# EAGLE board Spannungsversorgung_V4_mitBatze (EAGLE 9.6.2)
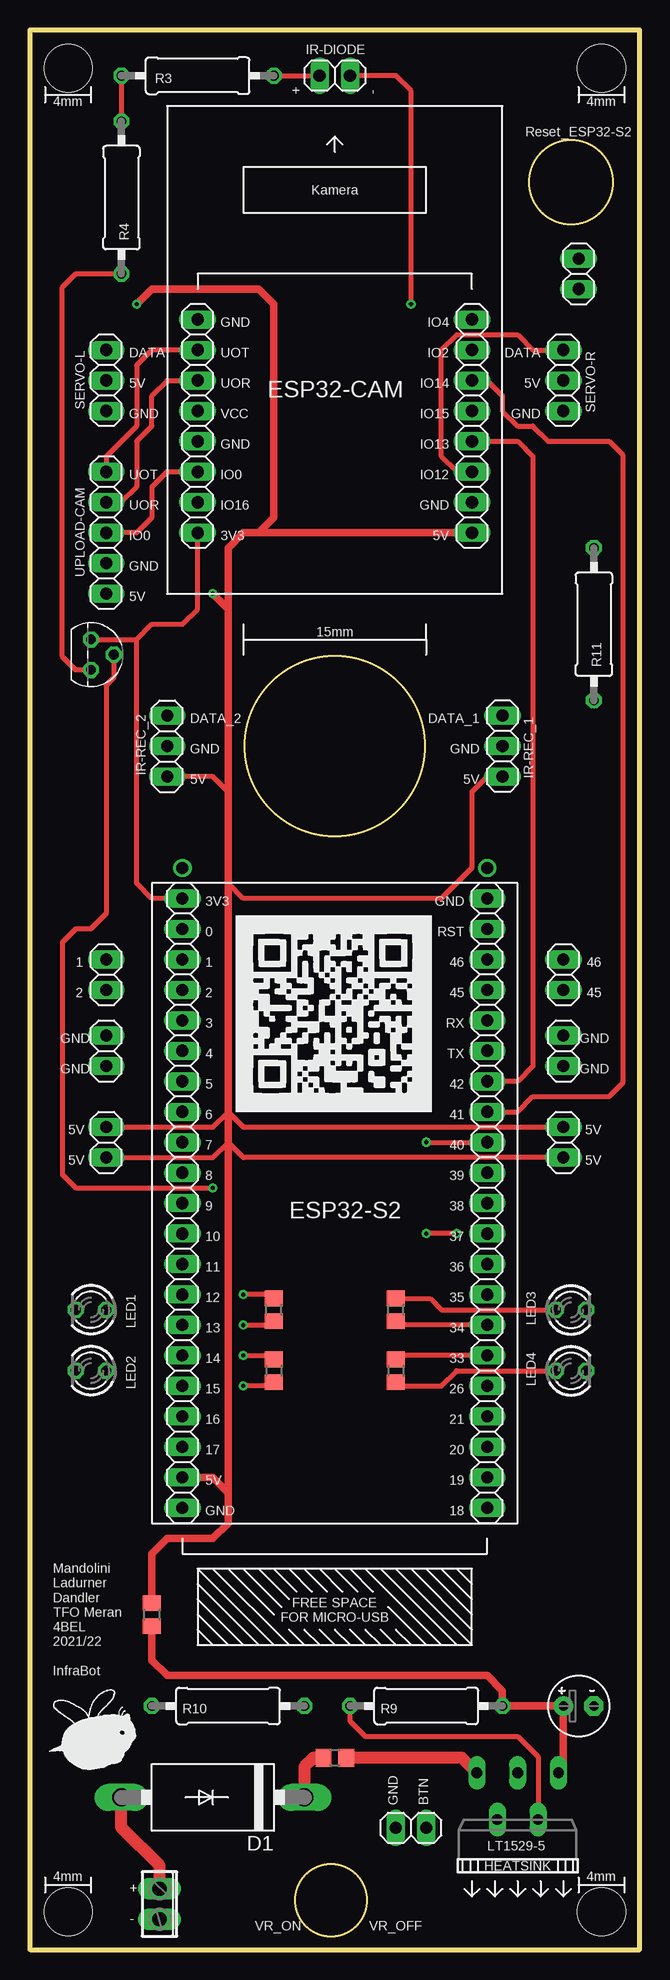
[diagram p0: board, top side]
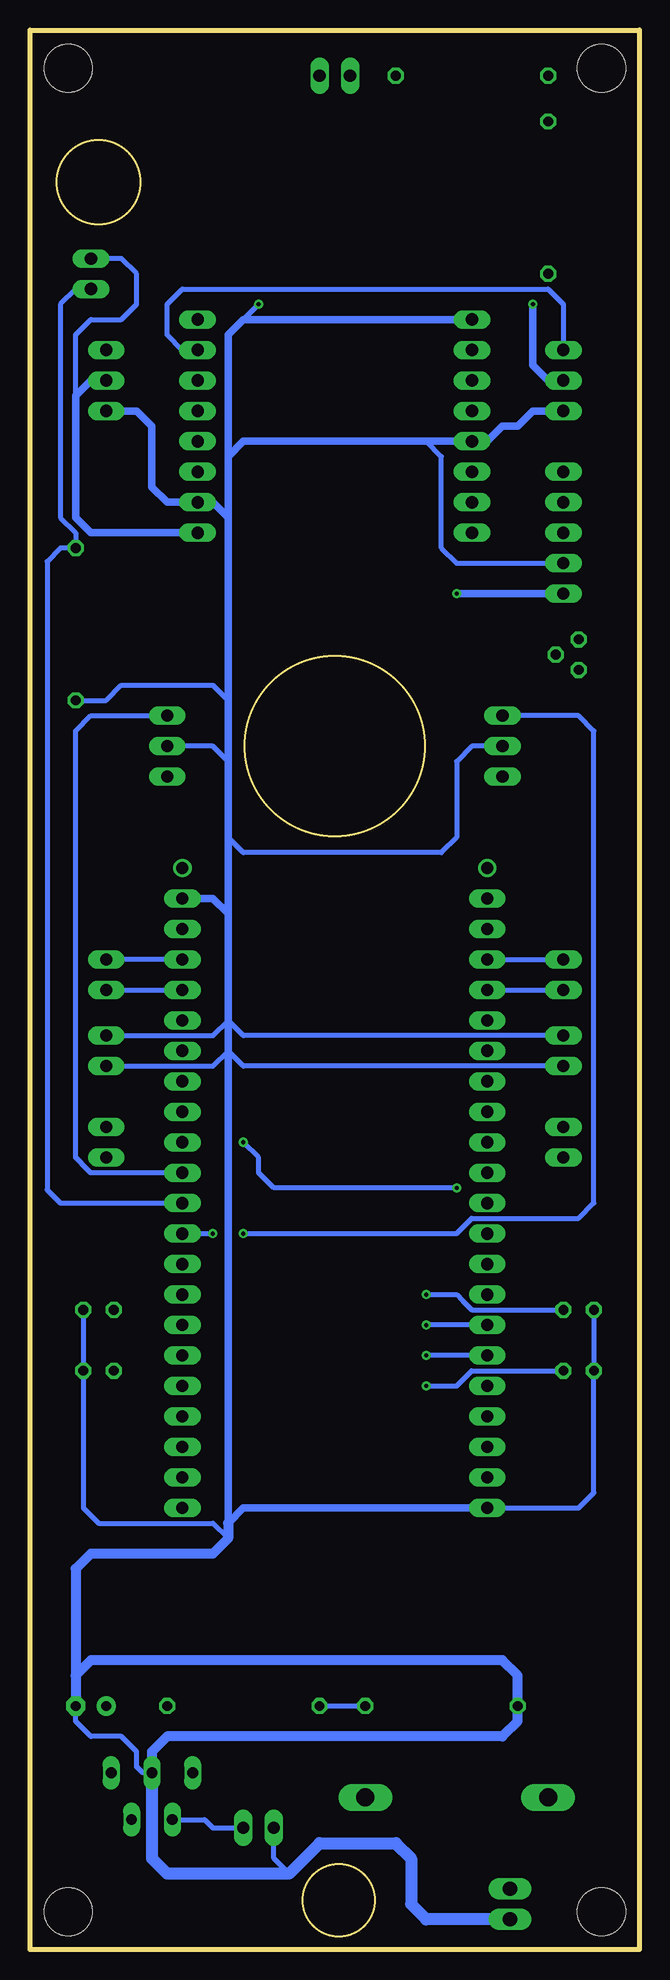
[diagram p1: board, bottom side, seen from below]

Size 50.8 x 160.02 mm. Coordinates in mm from the lower left corner, seen from the top.
Outline: 0,0 50.8,0 50.8,160.02 0,160.02 0,0
Copper layers (1*16): Top 0.035mm / dielectric 1.5mm / Bottom 0.035mm
Design rules "default *": minimum track width 6mil, minimum drill 0.35mm, track to track 12mil, track to pad 12mil, pad to pad 12mil, via to via 12mil, smd to smd 12mil, copper to edge 40mil, drill to drill 12mil, minimum pad ring 10mil, minimum via ring 8mil, stop-mask expansion 4mil, vias tented up to drill 0mil, thermal gap 10mil
Holes 4 mm at 3.17,156.84 47.62,156.84 47.62,3.17 3.17,3.17
Milling: area 17.9,92.8 to 32.9,107.8; area 22.1,1.1 to 28.1,7.1; area 41.6,143.8 to 48.6,150.8

## Footprints (pad centres in the part's own frame; a part is rotated, then mirrored left to right if it is on the bottom)
E2,5-5 = drill 0.813 pad 1.6: + -1.27,0 | drill 0.813 pad 1.6 octagon: - 1.27,0
DO201-15 = drill 1.499 long: A 7.62,0; C -7.62,0
TO220-5 = drill 0.9 long: 1 -3.4,-8.4; 2 -1.7,-4.5; 3 0,-8.4; 4 1.7,-4.5; 5 3.4,-8.4
1X19 = drill 1.016 long: 1 -22.86,0; 2 -20.32,0; 3 -17.78,0; 4 -15.24,0; 5 -12.7,0; 6 -10.16,0; 7 -7.62,0; 8 -5.08,0; 9 -2.54,0; 10 0,0; 11 2.54,0; 12 5.08,0; 13 7.62,0; 14 10.16,0; 15 12.7,0; 16 15.24,0; 17 17.78,0; 18 20.32,0; 19 22.86,0
1X08 = drill 1.016 long: 1 -8.89,0; 2 -6.35,0; 3 -3.81,0; 4 -1.27,0; 5 1.27,0; 6 3.81,0; 7 6.35,0; 8 8.89,0
1X03 = drill 1.016 long: 1 -2.54,0; 2 0,0; 3 2.54,0
1X02 = drill 1.016 long: 1 -1.27,0; 2 1.27,0
1X05 = drill 1.016 long: 1 -5.08,0; 2 -2.54,0; 3 0,0; 4 2.54,0; 5 5.08,0
LED3MM = drill 0.813 octagon: A -1.27,0; K 1.27,0
R0805 = smd 1.3 x 1.5: 1 -0.95,0; 2 0.95,0
0309/12 = drill 0.813 octagon: 1 -6.35,0; 2 6.35,0
TO92 = drill 0.813 octagon: 1 1.27,0; 2 0,1.905; 3 -1.27,0
2POL254 = drill 1.2 long: 1 -1.27,0; 2 1.27,0

## Placement (x,y rotation side)
C2  22µF  [E2,5-5]  45.72,20.32 0 top
D1  1N5400  [DO201-15]  15.24,12.7 180 top
IC2  LT1529-5  [TO220-5]  40.64,6.35 180 top
JP1  [1X19]  12.7,59.69 270 top
JP2  [1X19]  38.1,59.69 270 top
JP3  [1X08]  13.97,127 270 top
JP4  [1X08]  36.83,127 270 top
JP5  [1X03]  6.35,130.81 270 top
JP6  [1X03]  44.45,130.81 270 top
JP7  [1X02]  31.75,10.16 180 top
JP8  [1X02]  25.4,156.21 0 top
JP9  [1X03]  11.43,100.33 90 top
JP10  [1X02]  6.35,67.31 90 top
JP11  [1X02]  44.45,67.31 90 top
JP12  [1X02]  6.35,81.28 90 top
JP13  [1X02]  44.45,81.28 90 top
JP14  [1X02]  6.35,74.93 90 top
JP15  [1X02]  44.45,74.93 90 top
JP16  [1X02]  12.7,86.36 270 top
JP17  [1X02]  38.1,86.36 270 top
JP18  [1X03]  39.37,100.33 270 top
JP19  [1X02]  45.72,139.7 90 top
JP20  [1X05]  6.35,118.11 270 top
LED1  [LED3MM]  5.08,53.34 180 top
LED2  [LED3MM]  5.08,48.26 180 top
LED3  [LED3MM]  45.09,53.34 0 top
LED4  [LED3MM]  45.09,48.26 0 top
R1  0 Ohm  [R0805]  10.16,27.94 90 top
R2  0 Ohm  [R0805]  25.4,16.01 0 top
R3  10 Ohm  [0309/12]  13.97,156.21 0 top
R4  10 Ohm  [0309/12]  7.62,146.05 90 top
R5  330 Ohm  [R0805]  20.32,53.34 90 top
R6  330 Ohm  [R0805]  20.32,48.26 270 top
R7  330 Ohm  [R0805]  30.48,53.34 90 top
R8  330 Ohm  [R0805]  30.48,48.26 270 top
R9  270k Ohm  [0309/12]  33.02,20.32 0 top
R10  820 Ohm  [0309/12]  16.51,20.32 0 top
R11  10k Ohm  [0309/12]  46.99,110.49 90 top
T1  BC337  [TO92]  5.08,107.95 270 top
X1  [2POL254]  10.79,3.81 270 top

## Library data of the parts
C2 = rcl; SPICEPREFIX: C
D1 = diode
IC2 = ltc1440_lt1529_ds1302
JP1-JP20 = pinhead
LED1-LED4 = led
R1-R11 = rcl; SPICEPREFIX: R
T1 = transistor
X1 = con-phoenix-254; OC_FARNELL: unknown; OC_NEWARK: unknown

## Nets
3V3: JP3.8 JP16.1 T1.3
5V: JP1.18 JP4.8 JP5.2 JP6.2 JP9.1 JP10.1 JP10.2 JP11.1 JP11.2 JP18.3 JP19.2 JP20.5 R1.2
BATTERY: D1.C R2.1
BUTTON: IC2.4 JP7.1
DATA_1: JP1.2 JP12.1
DATA_2: JP1.1 JP12.2
DATA_3: JP2.2 JP13.1
DATA_4: JP2.1 JP13.2
GND: C2.- IC2.3 JP1.19 JP3.1 JP3.5 JP4.7 JP5.3 JP6.3 JP7.2 JP8.2 JP9.2 JP14.1 JP14.2 JP15.1 JP15.2 JP17.1 JP18.2 JP20.4 LED1.K LED2.K LED3.K LED4.K R10.1 R11.1 X1.2
HWSERIAL_0: JP2.6 JP4.3
HWSERIAL_1: JP2.5 JP4.5
IR_REC_1: JP2.8 JP18.1
IR_REC_2: JP2.10 JP9.3
IR_SEND: JP2.7 T1.2
N$1: R3.1 R4.2
N$2: JP8.1 R3.2
N$3: IC2.5 R2.2
N$4: D1.A X1.1
N$5: LED1.A R5.2
N$6: LED2.A R6.2
N$7: LED3.A R7.2
N$8: LED4.A R8.2
N$11: R4.1 T1.1
N$13: IC2.2 R9.1 R10.2
N$14: C2.+ IC2.1 R1.1 R9.2
RESET_CAM: JP3.6 JP20.3
RESET_S2: JP2.9 JP19.1 R11.2
RX_CAM: JP3.3 JP20.2
SERVO_L: JP4.2 JP5.1
SERVO_R: JP4.6 JP6.1
STATELED_1: JP1.13 R5.1
STATELED_2: JP1.14 R6.1
STATELED_3: JP2.13 R7.1
STATELED_4: JP2.14 R8.1
TX_CAM: JP3.2 JP20.1

## Tracks (layer width: path | path; a pad name or v marks a point on that pad's centre or on a via)
3V3
  Top 0.406: 8.89,109.22 8.89,88.9 10.16,87.63 JP16.1 | 8.89,109.22 10.16,110.49 12.7,110.49 13.97,111.76 JP3.8 | T1.3 8.89,109.22
5V  (via drill 0.35)
  Top 0.406: JP10.2 15.24,68.58 16.51,69.85 17.78,68.58 JP11.2 | JP10.1 15.24,66.04 16.51,67.31 17.78,66.04 JP11.1 | 16.51,96.52 15.24,97.79 JP9.1 | 16.51,88.9 17.78,87.63 34.29,87.63 36.83,90.17 36.83,96.52 38.1,97.79 JP18.3
  Top 0.61: R1.2 10.16,33.02 11.43,34.29 15.24,34.29 16.51,35.56 16.51,38.1 | 19.05,118.11 17.78,118.11 16.51,116.84 16.51,111.76 | 19.05,118.11 JP4.8 | 16.51,38.1 16.51,67.31 16.51,69.85 16.51,88.9 16.51,96.52 16.51,111.76 | 16.51,38.1 15.24,39.37 JP1.18 | 19.05,118.11 20.32,119.38 20.32,137.16 19.05,138.43 10.16,138.43 v8.89,137.16 | 16.51,111.76 v15.24,113.03
  Bottom 0.406: 46.99,129.54 46.99,134.62 45.72,135.89 43.18,135.89 41.91,137.16 41.91,139.7 43.18,140.97 JP19.2
  Bottom 0.61: JP6.2 45.72,130.81 46.99,129.54 46.99,119.38 45.72,118.11 JP4.8 | v8.89,137.16 8.89,132.08 7.62,130.81 JP5.2 | v15.24,113.03 JP20.5
BATTERY
  Top 1.016: R2.1 23.64,16.02 22.86,15.24 D1.C
BUTTON
  Bottom 0.406: IC2.4 36.25,10.85 35.56,10.16 JP7.1
DATA_1
  Bottom 0.406: JP1.2 JP12.1
DATA_2
  Bottom 0.406: JP1.1 JP12.2
DATA_3
  Bottom 0.406: JP13.1 JP2.2
DATA_4
  Bottom 0.406: JP2.1 JP13.2
GND  (via drill 0.35)
  Top 0.406: v31.75,137.16 31.75,154.94 30.48,156.21 JP8.2
  Bottom 0.406: 29.21,6.35 30.48,7.62 JP7.2 | IC2.3 41.42,14.75 41.91,15.24 41.91,16.51 43.18,17.78 45.72,17.78 46.99,19.05 C2.- | JP14.2 33.02,76.2 34.29,77.47 35.56,76.2 JP15.2 | JP14.1 33.02,73.66 34.29,74.93 35.56,73.66 JP15.1 | 34.29,99.06 35.56,100.33 JP18.2 | JP9.2 13.97,100.33 15.24,99.06 15.24,92.71 16.51,91.44 33.02,91.44 34.29,92.71 | LED1.K LED2.K 3.81,38.1 5.08,36.83 JP1.19 | LED3.K LED4.K 46.35,36.83 45.09,35.56 35.56,35.56 34.29,34.29 | JP3.5 12.7,125.73 | 17.78,125.73 16.51,124.46 16.51,116.84 15.24,115.57 JP20.4 | 33.02,135.89 v31.75,137.16 | 34.29,104.14 35.56,105.41 43.18,105.41 44.45,104.14 R11.1
  Bottom 0.61: 34.29,119.38 35.56,120.65 JP4.7 39.37,120.65 40.64,121.92 40.64,127 41.91,128.27 JP6.3 | 34.29,119.38 34.29,104.14 34.29,99.06 34.29,92.71 34.29,86.36 | 34.29,86.36 34.29,77.47 34.29,74.93 34.29,35.56 33.02,36.83 JP1.19 | JP17.1 35.56,87.63 34.29,86.36 | 34.29,124.46 34.29,134.62 33.02,135.89 JP3.1 | 34.29,124.46 34.29,119.38 | JP3.5 17.78,125.73 33.02,125.73 34.29,124.46 | 12.7,125.73 11.43,127 10.16,127 8.89,128.27 JP5.3
  Bottom 0.813: IC2.3 40.64,16.51 39.37,17.78 11.43,17.78 10.16,19.05 R10.1 10.16,22.86 11.43,24.13 45.72,24.13 46.99,22.86 | 34.29,35.56 34.29,34.29 35.56,33.02 45.72,33.02 46.99,31.75 46.99,22.86 | 46.99,22.86 C2.-
  Bottom 1.016: IC2.3 40.64,7.62 39.37,6.35 29.21,6.35 26.67,8.89 20.32,8.89 19.05,7.62 19.05,3.81 17.78,2.54 X1.2
HWSERIAL_0
  Top 0.406: JP2.6 40.64,69.85 41.91,71.12 48.26,71.12 49.38,72.24 49.38,124.61 48.26,125.73 43.18,125.73 41.91,127 40.64,127 39.37,128.27 39.37,129.54 38.1,130.81 JP4.3
HWSERIAL_1
  Top 0.406: JP4.5 40.64,125.73 41.91,124.46 41.91,73.66 40.64,72.39 JP2.5
IR_REC_1
  Bottom 0.406: JP18.1 45.72,102.87 46.99,101.6 46.99,66.04 46.48,65.53 46.48,65.51 45.74,64.77 JP2.8
IR_REC_2  (via drill 0.35)
  Top 0.406: v35.56,59.69 v33.02,59.69
  Bottom 0.406: JP2.10 v35.56,59.69 | v33.02,59.69 15.24,59.69 14.73,60.2 14.73,60.22 13.99,60.96 5.08,60.96 3.81,62.23 3.81,101.6 5.08,102.87 JP9.3
IR_SEND  (via drill 0.35)
  Top 0.406: T1.2 6.99,106.05 6.35,105.41 6.35,86.36 5.08,85.09 3.81,85.09 2.69,83.97 2.69,64.62 3.81,63.5 v15.24,63.5 | v33.02,67.31 JP2.7
  Bottom 0.406: v33.02,67.31 31.75,66.04 31.75,64.77 30.48,63.5 v15.24,63.5
N$1
  Top 0.406: R3.1 R4.2
N$2
  Top 0.406: R3.2 JP8.1
N$3
  Top 1.016: IC2.5 35.98,16.02 R2.2
N$4
  Top 1.016: D1.A 7.62,10.16 10.79,6.99 X1.1
N$5  (via drill 0.35)
  Top 0.406: R5.2 20,54.61 v17.78,54.61
  Bottom 0.406: v17.78,54.61 15.24,54.61 14.73,54.1 14.73,54.08 13.99,53.34 LED1.A
N$6  (via drill 0.35)
  Top 0.406: R6.2 20,46.99 v17.78,46.99
  Bottom 0.406: v17.78,46.99 15.24,46.99 14.73,47.5 14.73,47.52 13.99,48.26 LED2.A
N$7
  Top 0.406: R7.2 33.34,54.29 34.29,53.34 LED3.A
N$8
  Top 0.406: R8.2 30.8,46.99 34.29,46.99 35.56,48.26 LED4.A
N$9  (via drill 1.02)
  other vias: 38.1,90.17
N$10  (via drill 1.02)
  other vias: 12.7,90.17
N$11
  Top 0.406: T1.1 3.81,106.68 2.69,107.8 2.69,138.58 3.81,139.7 R4.1
N$13
  Top 0.406: R9.1 26.67,19.05 27.94,17.78 40.64,17.78 42.34,16.08 IC2.2
  Bottom 0.406: R9.1 R10.2
N$14
  Top 0.61: IC2.1 44.45,15.16 C2.+ R9.2 39.37,21.59 38.1,22.86 11.43,22.86 10.16,24.13 R1.1
RESET_CAM
  Top 0.406: JP3.6 11.43,123.19 10.16,121.92 10.16,119.38 8.89,118.11 JP20.3
RESET_S2
  Bottom 0.406: JP19.1 46.99,138.43 48.26,137.16 48.26,119.38 46.99,118.11 R11.2 48.26,116.84 49.38,115.72 49.38,63.35 48.26,62.23 JP2.9
RX_CAM
  Top 0.406: JP3.3 11.43,130.81 10.16,129.54 10.16,127 8.89,125.73 8.89,121.92 7.62,120.65 JP20.2
SERVO_L
  Bottom 0.406: JP4.2 38.1,133.35 39.37,134.62 39.37,137.16 38.1,138.43 7.62,138.43 6.35,137.16 JP5.1
SERVO_R
  Top 0.406: JP4.6 35.56,123.19 34.29,124.46 34.29,133.37 35.54,134.62 40.64,134.62 41.91,133.35 JP6.1
STATELED_1  (via drill 0.35)
  Top 0.406: v17.78,52.07 20,52.07 R5.1
  Bottom 0.406: JP1.13 v17.78,52.07
STATELED_2  (via drill 0.35)
  Top 0.406: v17.78,49.53 20,49.53 R6.1
  Bottom 0.406: JP1.14 v17.78,49.53
STATELED_3
  Top 0.406: R7.1 30.8,52.07 JP2.13
STATELED_4
  Top 0.406: R8.1 30.8,49.53 JP2.14
TX_CAM
  Top 0.406: JP3.2 10.16,133.35 8.89,132.08 8.89,127 6.35,124.46 JP20.1

## Text on the board
tPlace: ESP32-CAM | ESP32-S2
tNames: IR-DIODE | + | - | 4mm | 4mm | Reset_ESP32-S2 | Kamera | GND | IO4 | DATA | UOT | IO2 | DATA | 5V | UOR | IO14 | 5V | SERVO-L | GND | VCC | IO15 | GND | SERVO-R | GND | IO13 | UOT | IO0 | IO12 | UOR | IO16 | GND | IO0 | 3V3 | 5V | GND | UPLOAD-CAM | 5V | 15mm | IR-REC_1 | DATA_2 | DATA_1 | GND | GND | IR-REC_2 | 5V | 5V | 3V3 | GND | 0 | RST | 1 | 1 | 46 | 46 | 2 | 2 | 45 | 45 | 3 | RX | GND | GND | 4 | TX | GND | GND | 5 | 42 | 6 | 41 | 5V | 5V | 7 | 40 | 5V | 5V | 8 | 39 | 9 | 38 | 10 | 37 | 11 | 36 | 12 | 35 | 13 | 34 | 14 | 33 | 15 | 26 | 16 | 21 | 17 | 20 | 5V | 19 | GND | 18 | FREE SPACE / FOR MICRO-USB | Mandolini / Ladurner / Dandler / TFO Meran / 4BEL / 2021/22 / / InfraBot | GND | BTN | HEATSINK | 4mm | 4mm | + | - | VR_ON | VR_OFF